# Altium PCB PCB1.PcbDoc
Units mm, origin at the board's own origin, x right, y up, seen from the top; angles counter-clockwise.
Board outline 90 x 65 mm, 4 copper layers (Top Layer, POWER, GND, Bottom Layer), stack 0.603 mm thick; 33 components, 21 nets, 101 pads, 5 vias.
Unrouted connection lines stored in the file: 5.
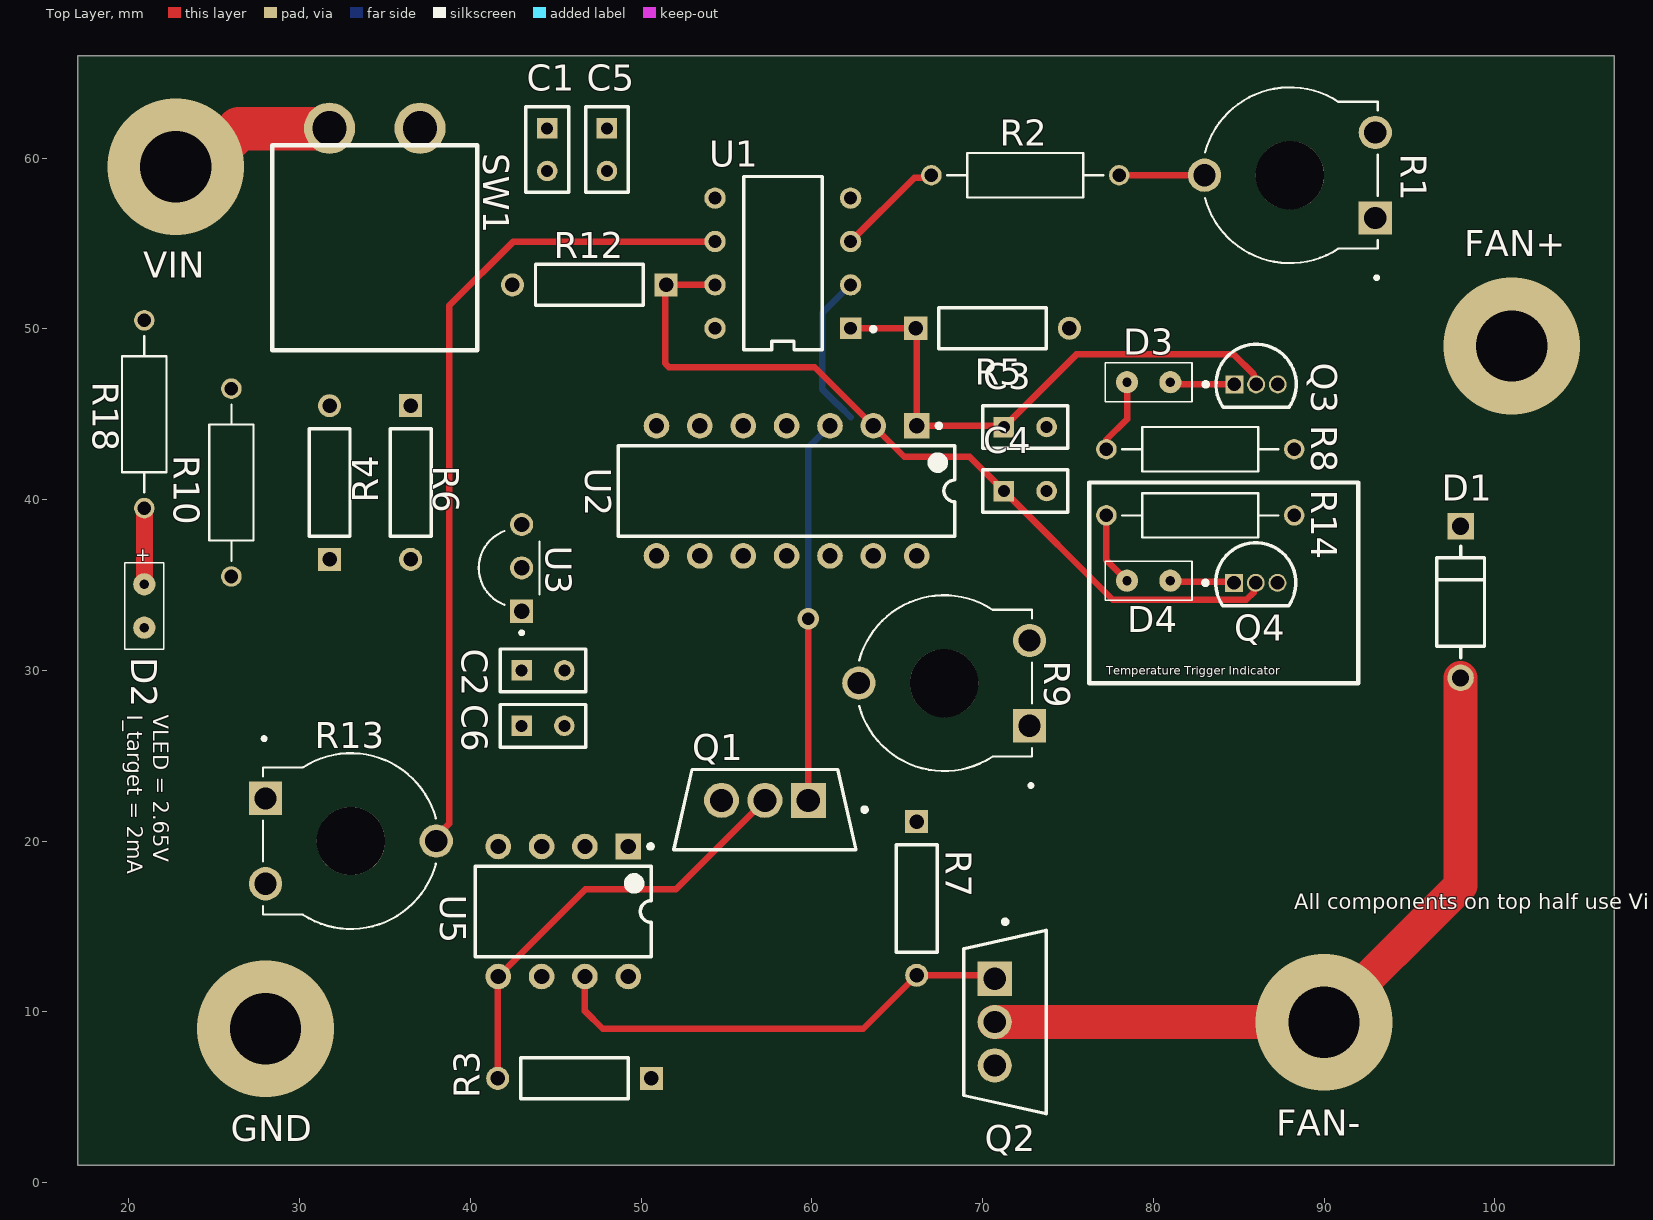
[diagram p0: Top Layer view]
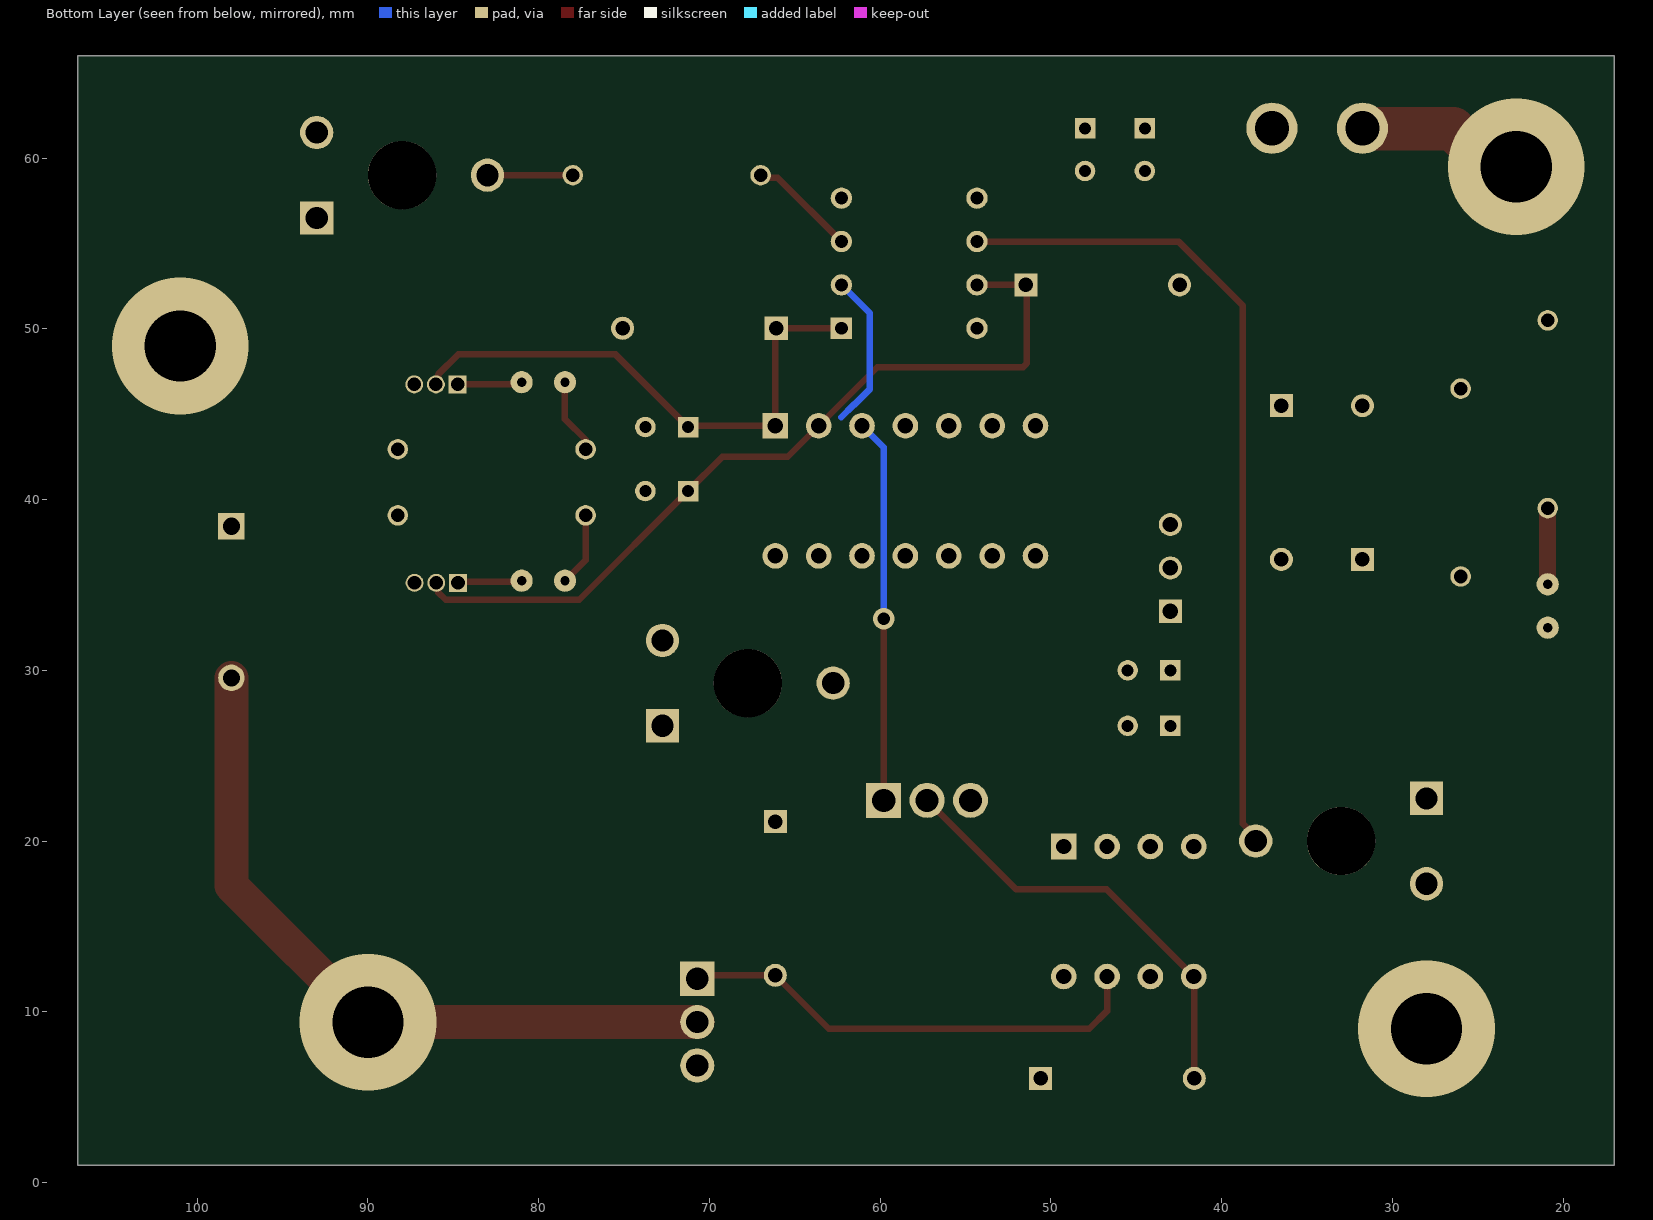
[diagram p1: Bottom Layer view, seen from below]
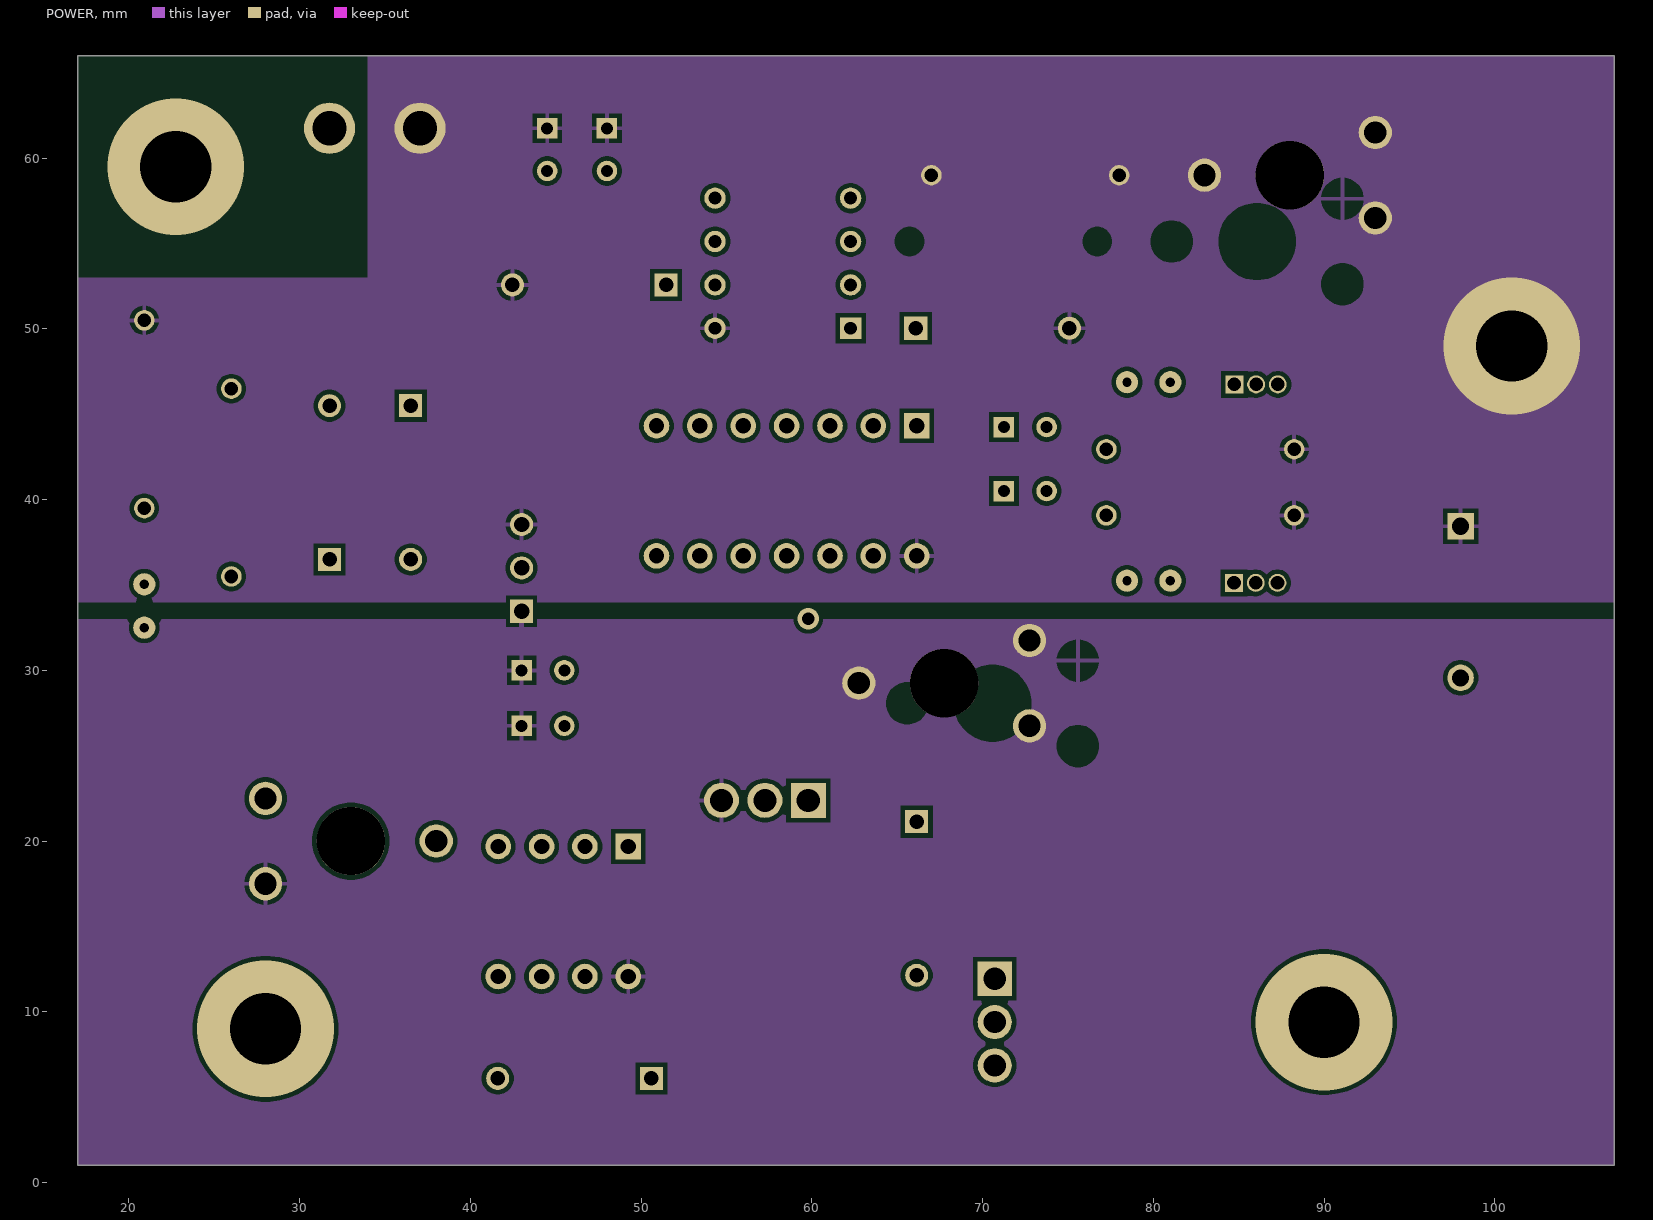
[diagram p2: POWER]
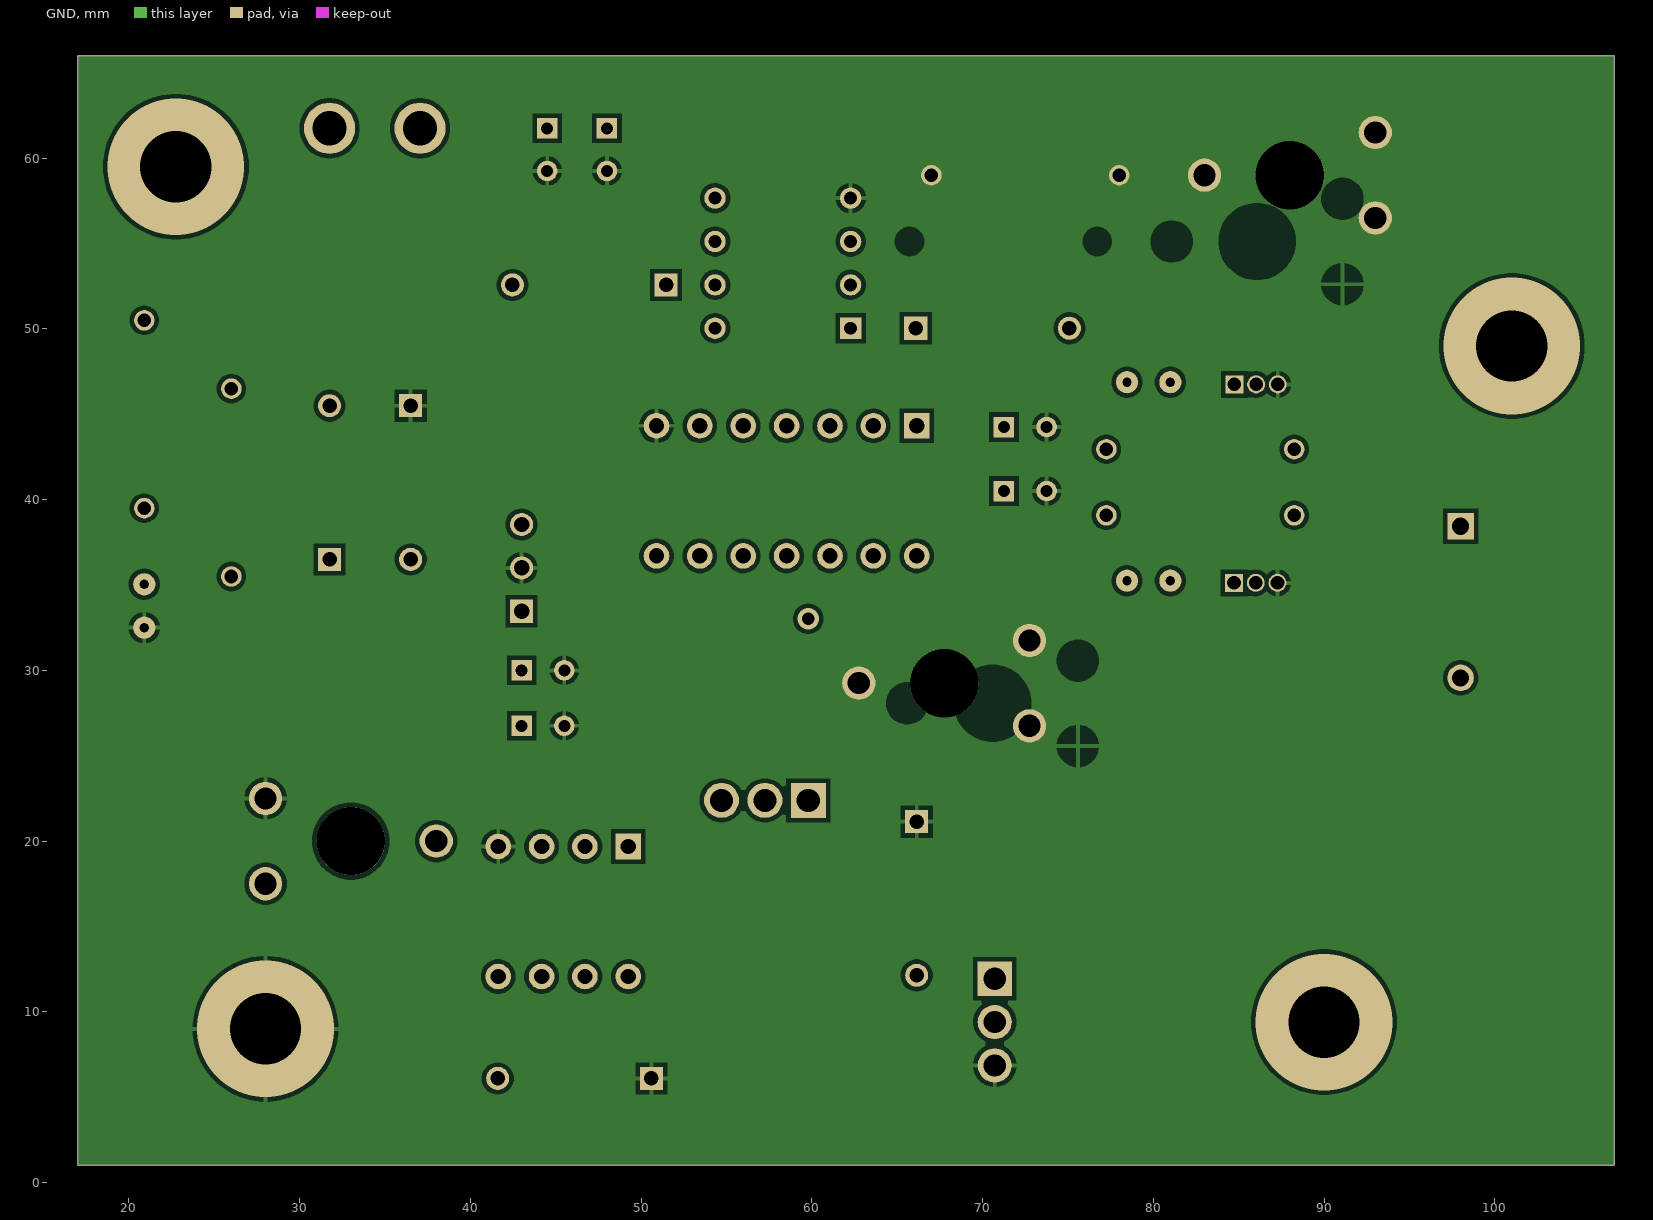
[diagram p3: GND]

## Layer stack, top to bottom
Top Solder: solder mask 0.0102, Solder Resist, Dk 3.5
Top Layer: signal copper 0.0356
Dielectric 2: prepreg 0.0711, PP-006, Dk 4.1
POWER: signal copper 0.035
Dielectric 1: dielectric 0.32, FR-4, Dk 4.8
GND: signal copper 0.035
Dielectric 3: prepreg 0.0711, PP-006, Dk 4.1
Bottom Layer: signal copper 0.0356
Bottom Solder: solder mask 0.0102, Solder Resist, Dk 3.5

## Board outline
17,1 17,66 107,66 107,1

## Design rules (kind name [scope] priority, off if disabled: settings)
Clearance [All] p1: gap=0.254 ignorepadtopadclearanceinfootprint=TRUE except(0.1: Arc-Arc Arc-Track Arc-SMDPad Track-Track Track-SMDPad; 0.2: Arc-Via Track-Via; 0.28: Arc-THPad Track-THPad)
HoleSize [All] p1: absolutevalues=TRUE maxlimit=6.3 minlimit=0.15 maxpercent=80.000 minpercent=20.000
PolygonConnect [All] p1: connectstyle=Relief reliefconductorwidth=0.254 reliefentries=4 polygonreliefangle="90 Angle" airgapwidth=0.254
RoutingVias [All] p1: holewidth=0.711 width=1.27 viastyle="Through Hole" minholewidth=0.711 minwidth=1.27 maxholewidth=0.711 maxwidth=1.27
SolderMaskExpansion [All] p1: expansion=0.102 istentingtop=FALSE
Width [All] p1: maxlimit=2.54 minlimit=0.254 preferedwidth=1 minimp=50.000000 maximp=50.000000 favimp=50.000000
29 further rules are at their usual default settings.

## Components (designator, comment, footprint, x,y, rotation, side; value= is the part's Value field where it differs from the comment)
C1 "RDEC71E105K0P1H03B" FP-RDE0P1-MFG 44.5,60.5 r270 top
C2 "RDEC71E105K0P1H03B" FP-RDE0P1-MFG 44.25,30 r0 top
C3 "RDEC71E105K0P1H03B" FP-RDE0P1-MFG 72.5,44.25 r0 top
C4 "RDEC71E105K0P1H03B" FP-RDE0P1-MFG 72.5,40.5 r0 top
C5 "RDEC71E105K0P1H03B" FP-RDE0P1-MFG 48,60.5 r270 top
C6 "RDEC71E105K0P1H03B" FP-RDE0P1-MFG 44.25,26.75 r0 top
D1 "1N4007" FP-1N4007-MFG 98,34 r270 top value=15pF
D2 "WP7113LZGCK" WP7113LZGCK 20.9,35.04 r270 top
D3 "WP7113LZGCK" WP7113LZGCK 78.46,46.875 r0 top
D4 "WP7113LZGCK" WP7113LZGCK 78.46,35.25 r0 top
Q1 "G050P03T" FP-340AT-MFG 57.25,21.844 r270 top
Q2 "IRLZ44PBF" FP-PG-TO220-3-MFG 71.322,9.398 r0 top
Q3 "BS170" ONSC-TO-92-3-29-11 86.02,46.75 r0 top
Q4 "BS170" ONSC-TO-92-3-29-11 86,35.125 r0 top
R1 "PTN10-D100HB20" TRIM_PTN10-D100HB20 88,59 r90 top
R2 "MFR-25FRF52-10K" RESAD1100W55L680D260 72.5,59 r180 top
R3 "MFR-25FBF52-100K" RESA60-630X240 46.1,6.1 r180 top
R4 "MFR-25FBF52-100K" RESA60-630X240 31.75,41 r90 top
R5 "MFR-25FBF52-100K" RESA60-630X240 70.585,50.038 r0 top
R6 "104AP-2" RESA60-630X240 36.5,41 r270 top
R7 "MFR-25FBF52-100K" RESA60-630X240 66.14,16.637 r270 top
R8 "MFR-25FBF52-12K7" RESAD1100W55L680D260 82.75,42.95 r180 top
R9 "PTN10-D100HB20" TRIM_PTN10-D100HB20 67.75,29.25 r90 top
R10 "MFR-25FRF52-10K" RESAD1100W55L680D260 26,41 r90 top
R12 "MFR-25FBF52-100K" RESA60-630X240 46.963,52.578 r180 top
R13 "PTN10-D100HB20" TRIM_PTN10-D100HB20 33,20 r270 top
R14 "MFR-25FBF52-12K7" RESAD1100W55L680D260 82.75,39.075 r180 top
R18 "RNF14FTD7K50" RESAD1100W55L680D260 20.9,45 r270 top
SW1 "GPTS203211B" GPTS203211B 37.05,61.75 r180 top
U1 "LM393AP" FP-P0008A-MFG 58.299,53.848 r180 top
U2 "CD4001UBE" N0014A 58.52,40.513 r270 top
U3 "AP7381-50V-A" TO92254P480H870-3 43,36 r90 top
U5 "ATtiny13A-PU" 8P3 45.439,15.875 r270 top

## Footprints (in the part's own frame and the unit in brackets; to place one, negate y for a bottom-side part, rotate by r counter-clockwise, add the part's x,y. Pads: shape width x height; smd on the part's side, far side on the other; paste and mask are expansions set on the pad)
8P3 [mm] "DIP, 8-Pin, Row Spacing 7.62 mm, Pitch 2.54 mm"
  rect 1.5x1.5 hole 0.9: 1(-3.81,3.81)
  round 1.5 hole 0.9: 2(-3.81,1.27) 3(-3.81,-1.27) 4(-3.81,-3.81) 5(3.81,-3.81) 6(3.81,-1.27) 7(3.81,1.27) 8(3.81,3.81)
  silkscreen extent -3.93,-5.15 2.65,5.24, body extent -3.6,-5.15 3.6,5.15, height 5.33
FP-1N4007-MFG [mm]
  rect 1.55x1.55 hole 1 paste-2539.97 mask+0: 1(-4.44,0)
  round 1.55 hole 1 paste-2539.97 mask+0: 2(4.44,0)
  silkscreen extent -3.26,-1.4 3.26,1.4, body extent -5.32,-1.5 5.32,1.5, height 0.25
FP-340AT-MFG [mm]
  rect 2.05x2.05 hole 1.35 paste-2539.97 mask+0: 1(-0.54,2.54)
  round 2.05 hole 1.35 paste-2539.97 mask+0: 2(-0.54,0) 3(-0.54,-2.54)
  silkscreen extent -2.35,-5.34 2.35,5.96, body extent -2.45,-5.44 2.45,5.44, height 0.25
FP-P0008A-MFG [mm]
  rect 1.25x1.25 hole 0.75 paste-2539.97 mask+0: 1(-3.97,3.81)
  round 1.25 hole 0.75 paste-2539.97 mask+0: 2(-3.97,1.27) 3(-3.97,-1.27) 4(-3.97,-3.81) 5(3.97,-3.81) 6(3.97,-1.27) 7(3.97,1.27) 8(3.97,3.81)
  silkscreen extent -5.42,-5.08 2.3,5.08, body extent -4.69,-5.18 4.69,5.18, height 0.25
FP-PG-TO220-3-MFG [mm]
  rect 2x2 hole 1.3 paste-2539.97 mask+0: 1(-0.61,2.54)
  round 2 hole 1.3 paste-2539.97 mask+0: 2(-0.61,0) 3(-0.61,-2.54)
  silkscreen extent -2.41,-5.38 2.41,6, body extent -2.51,-5.6 2.51,5.6, height 0.25
FP-RDE0P1-MFG [mm]
  rect 1.2x1.2 hole 0.7 paste-1000 mask+0: 1(-1.25,0)
  round 1.2 hole 0.7 paste-1000 mask+0: 2(1.25,0)
  silkscreen extent -2.5,-1.25 2.5,1.25, body extent -2.6,-1.35 2.6,1.35, height 0.25
GPTS203211B [mm] "Pushbutton Switch SPST Standard Through Hole"
  round 3 hole 2: 1(0,0) 2(5.3,0)
  silkscreen extent -3.35,1 8.65,13
N0014A [mm] "DIP, 14-Leads, Body 19.7x6.6mm, Pitch 2.54mm"
  rect 1.5x1.5 hole 0.9: 1(-3.81,7.62)
  round 1.5 hole 0.9: 2(-3.81,5.08) 3(-3.81,2.54) 4(-3.81,0) 5(-3.81,-2.54) 6(-3.81,-5.08) 7(-3.81,-7.62) 8(3.81,-7.62) 9(3.81,-5.08) 10(3.81,-2.54) 11(3.81,0) 12(3.81,2.54) 13(3.81,5.08) 14(3.81,7.62)
  silkscreen extent -3.93,-9.85 2.65,9.85, body extent -3.95,-9.85 3.95,9.85, height 5.08
ONSC-TO-92-3-29-11 [mm] "TO, 3-Leads, Body Dia 4.7mm, Pitch 1.27mm"
  rect 1.05x1.05 hole 0.8: 1(-1.27,0)
  round 1.05 hole 0.8: 2(0,0) 3(1.27,0)
  silkscreen extent -3.07,-1.34 2.35,2.35, body extent -2.35,-1.33 2.36,2.36, height 7.87
RESA60-630X240 [mm] "Axial Resistor, 2-Leads, Dia 2.4mm, Body Length 6.3mm"
  rect 1.35x1.35 hole 0.85: 1(-4.5,0)
  round 1.35 hole 0.85: 2(4.5,0)
  silkscreen extent -3.15,-1.2 3.15,1.2, body extent -3.15,-1.2 3.15,1.2, height 2.4
RESAD1100W55L680D260 [mm]
  round 1.2 hole 0.8: 1(-5.5,0) 2(5.5,0)
  silkscreen extent -4.58,-1.3 4.58,1.3
TO92254P480H870-3 [mm]
  rect 1.35x1.35 hole 0.9: 1(-2.54,0)
  round 1.35 hole 0.9: 2(0,0) 3(2.54,0)
  silkscreen extent -3.9,-1.04 2.16,2.51
TRIM_PTN10-D100HB20 [mm]
  rect 1.95x1.95 / inner round 1.95 / far side rect 1.95x1.95 hole 1.3: A(-2.5,-5)
  round 1.95 hole 1.3: E(2.5,-5) S(0,5)
  round 4 hole 4 unplated: ""(0,0)
  silkscreen extent -6.1,-5.18 5.15,4.97
WP7113LZGCK [mm]
  round 1.3 hole 0.55: 1(0,0) 2(2.54,0)
  silkscreen extent -1.27,-1.14 3.81,1.14

## Part data
C1 C2 C3 C4 C5 C6: library part CMP-06035-016937-1, "Ceramic Capacitor 1uF ±10% 25V X7S Radial", Capacitance=1uF, Case/Package=Radial, Dielectric=X7S, Max Operating Temperature=125°C, Min Operating Temperature=-55°C, Package Quantity=500, Resistor Type=Ceramic, Tolerance=10%, Voltage Rating=25V, Height=3.5mm, Height - Seated (Max)=0.236inch, Lead Diameter=0.5mm, Lead Pitch=0.098inch, Lead/Base Style=Kinked, Length=3.6mm, Mount="Through Hole", Packaging=Bulk, Termination=Radial, Voltage Rating (DC)=25V, Width=0.098inch
D1: library part CMP-123542-000001-1, "Rectifier diode 1000 V 1 A DO-41, ,", Capacitance=15pF, Forward Current=1A, Manufacturer=Diotec, Max Junction Temp=+175°C, Max Repetitive Reverse Voltage=1000V, Max Surge Forward Current=27A, Peak Reverse Current=5uA, Temperature="-50°C to +175°C", Temperature Range Low=-50°C, Automotive=No, Category=Diode, ComponentLink2Description=Datasheet, ComponentLink2URL=https://datasheet.octopart.com/1N4007-Diotec-datasheet-62346875.pdf, Device Class L1="Discrete Semiconductors", Device Class L2=Diodes, Device Class L3="Rectifier Diodes", Height=2.8mm, Ipc Land Pattern Name=DIOAD888W100L520D280, Lead Free=Yes, Manufacturer Part Number=1N4007, Octopart=https://octopart.com/1n4007-diotec-4040411, Package=1N4007, Reverse Voltage=1000V, RoHS=TRUE, Temperature Range High=+175°C
D2 D3 D4: "Green 525nm LED Indication - Discrete 2.65V Radial"
Q1: library part CMP-00278-84330911-1, "P-30V,-85A,RD(MAX)<5M@-10V,VTH-1", Case/Package=TO-220AB, Continuous Drain Current (ID)=24A, Current Rating=-24A, Drain to Source Breakdown Voltage=-20V, Drain to Source Resistance=5mΩ, Drain to Source Voltage (Vdss)=20V, Gate to Source Voltage (Vgs)=8V, Input Capacitance=1.59nF, Manufacturer Lifecycle Status=OBSOLETE, Max Operating Temperature=175°C, Max Power Dissipation=60W, Min Operating Temperature=-55°C, Resistance=50mΩ, Threshold Voltage=-700mV, Element Configuration=Single, Fall Time=70ns, Height=16.3mm, Lead Free="Lead Free", Length=10.67mm, Lifecycle Status=Obsolete, Mount="Through Hole", NexarPartId=84330911, Number of Elements=1, Number of Pins=3, Power Dissipation=60W, Radiation Hardening=No, Rds On Max=50mΩ, REACH SVHC="No SVHC", Rise Time=27ns, RoHS=Compliant, Schedule B=8541290080, Turn-Off Delay Time=120ns, Turn-On Delay Time=15ns, Voltage Rating (DC)=-20V, Weight=1.8g, Width=4.7mm
Q2: library part CMP-32901-000590-1, "MOSFET N-CH 60V 50A TO220AB", Case/Package=TO-220, Continuous Drain Current (ID)=95A, Drain to Source Voltage (Vdss)=60V, Input Capacitance=4.01nF, Max Operating Temperature=175°C, Max Power Dissipation=125W, Min Operating Temperature=-55°C, Threshold Voltage=3.7V, Halogen Free="Halogen Free", Lead Free="Lead Free", Max Dual Supply Voltage=60V, Mount="Through Hole", Number of Pins=3, Packaging=Rail/Tube, Rds On Max=5.9mR, REACH SVHC="No SVHC"
Q3 Q4: library part CMP-1058-00929-1, "Small Signal MOSFET, 500 mA, 60 V, N-Channel, 3-Pin TO-92, Bulk Box", Manufacturer="On Semiconductor", Package Type=TO-92, Channel Polarity="N Channel", ComponentLink1Description="Manufacturer URL", ComponentLink1URL=http://www.onsemi.com/, ComponentLink2Description=Datasheet, ComponentLink2URL=http://www.onsemi.com/pub_link/Collateral/BS170-D.PDF, ComponentLink3Description="Package Specification", ComponentLink3URL=http://www.onsemi.cn/pub_link/Collateral/2N6426-D.PDF, Configuration=Single, DatasheetVersion="Rev. 6", ID Max (A)=0.5, Mounting Technology="Through Hole", PackageDescription="3-Pin Transistor Outline, Body 4.825 x 3.685 mm, Pitch 1.27 mm", PackageReference=TO-92-3-29-11_AM_SL, PackageVersion="Rev. AM", Packing="Bulk Box", PartNumber=BS170, PD Max (W)=0.35, V(BR)DSS Min (V)=60, VGS Max (V)=20, VGS(th) Max (V)=3
R1 R9 R13: "10 mm, 1 MÎ©, Linear, Through Hole, Vertical, Shaftless Hexagonal Trimmer Potentiometer", Package=None, Check_prices=https://www.snapeda.com/parts/PTN10-D100HB20/CUI+Devices/view-part/?ref=eda, CUI_purchase_URL=https://www.cuidevices.com/product/motion-and-control/potentiometers/trimmer-potentiometers/ptn10-d100hb20?utm_source=snapeda.com&utm_medium=referral&utm_campaign=snapedaBOM, MF="CUI Devices", MP=PTN10-D100HB20, SnapEDA_Link=https://www.snapeda.com/parts/PTN10-D100HB20/CUI+Devices/view-part/?ref=snap
R2 R10: "RES 280K OHM 1/4W 1% AXIAL", Package=None, Availability=Unavailable, MP=MFR-25FRF52-10K, Price=None
R3 R4 R5 R7 R12: library part CMP-1659-00073-1, "Axial Resistor, 100 KOhm, +/- 1%, 0.25 W, -55 to 155 degC, 2-Pin THD, RoHS, Bulk", Case\Package=Axial, Max Operating Temperature="155 degC", Min Operating Temperature="-55 degC", Package Quantity=200, Power Rating="250 mW", Resistance="475 Ohm", Tolerance=1%, Voltage Rating="250 V", ComponentLink1Description="Manufacturer URL", ComponentLink1URL=http://www.yageo.com/, ComponentLink2Description=Datasheet, ComponentLink2URL=http://www.yageo.com/documents/recent/Yageo%20LR_MFR_2013.pdf, DatasheetVersion=Apr-13, Length="0.248 inch", Mount="Through Hole", PackageDescription="2-Pin Axial Lead, Dia 2.4 mm, Body Length 6.3 mm", PackageReference=MFR-25, Packaging=Bulk, RoHSCompliant=true
R6: library part CMP-1659-00073-1, "NTC THERMISTORS 100KOHM 0.5%", Case\Package=Axial, Max Operating Temperature="155 degC", Min Operating Temperature="-55 degC", Package Quantity=200, Power Rating="250 mW", Resistance="475 Ohm", Tolerance=1%, Voltage Rating="250 V", ComponentLink1Description="Manufacturer URL", ComponentLink1URL=http://www.yageo.com/, ComponentLink2Description=Datasheet, ComponentLink2URL=http://www.yageo.com/documents/recent/Yageo%20LR_MFR_2013.pdf, DatasheetVersion=Apr-13, Length="0.248 inch", Mount="Through Hole", PackageDescription="2-Pin Axial Lead, Dia 2.4 mm, Body Length 6.3 mm", PackageReference=MFR-25, Packaging=Bulk, RoHSCompliant=true
R8 R14: "RES 12.7K OHM 1% 1/4W AXIAL"
R18: library part MFR-25FRF52-10K, "RES 280K OHM 1/4W 1% AXIAL", Package=None, Availability=Unavailable, MP=MFR-25FRF52-10K, Price=None
SW1: "Pushbutton Switch SPST Standard Through Hole"
U1: library part CMP-04896-000062-1, "IC DUAL DIFF COMPARATOR 8-DIP", Case/Package=PDIP, Input Bias Current=250nA, Input Offset Voltage (Vos)=2mV, Max Dual Supply Voltage=18V, Max Operating Temperature=70°C, Max Supply Current=500uA, Max Supply Voltage=30V, Min Dual Supply Voltage=1V, Min Operating Temperature=0°C, Min Supply Voltage=2V, Nominal Supply Current=1mA, Output Current=20mA, Output Current Per Channel=6mA, Package Quantity=50, Quiescent Current=2.5mA, Voltage Gain=106.02dB, Contact Plating=Gold, Lead Free="Lead Free", Max Input Current=250nA, Mount="Through Hole", Number Of Channels=2, Number of Elements=2, Number of Pins=8, Output Type=TTL, Packaging=Rail/Tube, Radiation Hardening=No, REACH SVHC="No SVHC", Response Time=0.3us, RoHS Compliant=Yes, Type="General Purpose", Weight=0.015535oz
U2: library part CMP-0806-00187-3, "CMOS Quad 2-Input NOR Gate, N0014A, TUBE", F @ Nom Voltage(Max)(Mhz)=8, Generic Part Number=CD4001UB, ICC @ Nom Voltage(Max)(mA)=0.015, Manufacturer="Texas Instruments", Operating Temperature Range(C)="-55 to 125", Rating=Catalog, tpd @ Nom Voltage(Max)(ns)=60, Voltage(Nom)(V)=10, Bits(#)=4, Code_JEDEC=MS-001, DatasheetVersion=SCHS016C, Input Type=CMOS, Output Drive (IOL/IOH)(Max)(mA)=1.5/-1.5, Output Type=CMOS, PackageReference=N0014A, PackageVersion=http://www.ti.com/lit/ml/mpdi002c/mpdi002c.pdf, VCC(Max)(V)=18, VCC(Min)(V)=3
U3: "Linear Voltage Regulator IC Positive Fixed 1 Output 150mA TO-92", Package="TO-92 Diodes Inc.", Check_prices=https://www.snapeda.com/parts/AP7381-50V-A/Diodes%20Inc./view-part/2887105/?ref=eda, Digi-Key_Part_Number=AP7381-50V-ADICT-ND, MF="Diodes Inc.", MP=AP7381-50V-A, Purchase-URL=https://pricing.snapeda.com/search/part/AP7381-50V-A/?ref=eda, SnapEDA_Link=https://www.snapeda.com/parts/AP7381-50V-A/Diodes%20Inc./view-part/2887105/?ref=snap
U5: library part CMP-0093-00049-2, "8-bit AVR Microcontroller, 1.8-5.5V, 20MHz, 1KB Flash, 64 Bytes EEPROM, 64 Bytes SRAM, 8-pin PDIP, Industrial Grade (-40°C to 85°C), Pb-Free", Code_JEDEC=MS-001-BA, ComponentLink1Description="Manufacturer URL", ComponentLink1URL=http://www.atmel.com/, ComponentLink2Description="ATtiny13A Datasheet", ComponentLink2URL=http://www.atmel.com/dyn/resources/prod_documents/doc8126.pdf, ComponentLink3Description="ATtiny13A Summary", ComponentLink3URL=http://www.atmel.com/dyn/resources/prod_documents/8126S.pdf, DatasheetVersion="revE, Jul-2010", PackageDescription="8-Lead, 0.300\" Wide Body, Plastic Dual In-Line Package (PDIP)", PackageReference=8P3, PackageVersion="revB, Jan-2002", RevisionNote="DatasheetVersion updated. URLs added."

## Via types
v1: diameter 8/8/8/8 (per signal layer), hole 4.18, Top Layer to Bottom Layer, 4 vias
v2: diameter 1.27, hole 0.711, Top Layer to Bottom Layer, 1 vias

## Nets (pads, with @x,y where several pads share a name; then routed paths per layer and width w, separated by ;. In a path a pad name is that pad's centre, name@x,y a point inside that pad or via, vN(x,y) a via of type N, cw(c..) or ccw(c..) an arc to the next point about the centre after c; other vN are vias at no path point)
GND: C1.2 C2.2 C3.2 C4.2 C5.2 C6.2 D2.2 Q2.3 Q3.3 Q4.3 R1.A R3.1 R6.1 R7.1 R9.A R13.A U1.4 U2.7 U3.2 U5.4
  other v1: 28,9
NetC3_1: C3.1 Q3.2 R5.1 U1.1 U2.1 | length 32.2
  Top Layer w0.381: U1.1 R5.1 66.14,49.983 U2.1 71.177,44.323 C3.1 75.5,48.5 84.715,48.5 85.892,47.323 85.892,46.878 Q3.2
NetC4_1: C4.1 Q4.2 R12.1 U1.7 U2.2 | length 48.5
  Top Layer w0.381: U1.7 R12.1 51.408,52.523 51.408,47.975 51.631,47.752 60.171,47.752 U2.2 65.414,42.509 69.241,42.509 C4.1 77.62,34.13 85.45,34.13 85.872,34.552 85.872,34.997 Q4.2
NetD1_2: D1.2 Q2.2 | length 42.6
  Top Layer w2: Q2.2 89.398,9.398 v1@89.699,9.699 ; v1(90,9.398) 98,17.398 D1.2
NetD2_1: D2.1 R18.2 | length 4.5
  Top Layer w1: D2.1 R18.2
NetD3_1: D3.1 R8.2 | length 3.8
  Top Layer w0.381: R8.2@77.25,43.5 78.46,44.71 D3.1@78.46,46.75
NetD3_2: D3.2 Q3.1 | length 3.8
  Top Layer w0.381: D3.2@81,46.75 Q3.1
NetD4_1: D4.1 R14.2 | length 4.3
  Top Layer w0.381: R14.2 77.25,36.46 D4.1
NetD4_2: D4.2 Q4.1 | length 3.8
  Top Layer w0.381: D4.2 81.062,35.188 84.668,35.188 Q4.1
NetQ1_1: Q1.1 U2.3 | length 22.5
  Top Layer w0.381: Q1.1 v2(59.79,33.02)
  Bottom Layer w0.381: v2(59.79,33.02) 59.79,43.053 U2.3
NetQ1_2: Q1.2 R3.2 U5.5 | length 26.3
  Top Layer w0.381: R3.2 41.614,6.115 41.614,12.05 U5.5 46.729,17.165 52.031,17.165 Q1.2 Q1.2@57.556,22.078
NetQ2_1: Q2.1 R7.2 U5.7 | length 27.8
  Top Layer w0.381: U5.7 46.709,10.041 47.75,9 63.003,9 R7.2 70.513,12.137 Q2.1
NetR1_S: R1.S R2.1 | length 5
  Top Layer w0.381: R2.1 R1.S
  Bottom Layer w0.381: R2.1@77.99,58.99 R2.1
NetR2_2: R2.2 U1.3 | length 6.3
  Top Layer w0.381: U1.3 65.994,58.843 66.843,58.843 R2.2
NetR4_1: R4.1 R6.2 R10.1
NetR9_S: R9.S U1.2 | length 9.2
  Bottom Layer w0.381: U1.2 60.6,50.909 60.6,46.472 61.529,45.544 61.566,45.544 62.281,44.829
NetR10_2: R10.2 U1.5
NetR13_S: R13.S U1.6 | length 48.8
  Top Layer w0.381: R13.S 38,20.258 38.75,21.008 38.75,51.35 42.518,55.118 U1.6
NetSW1_2: SW1.2 | length 9.9
  Top Layer w2.54: v1(22.75,59.5) 24.227,59.5 26.44,61.713 31.713,61.713 SW1.2
VCC: C1.1 C5.1 D1.1 R1.E R5.2 R8.1 R12.2 R14.1 R18.1 SW1.1 U1.8 U2.14 U3.3 | length 0.6
  Top Layer w0.381: R12.2@42.463,52.316 R12.2 ; U2.14 U2.14@66.443,36.703
  other v1: 101,49
VDD: C2.1 C6.1 Q1.3 R4.2 R9.E R13.E U3.1 U5.8 | length 0.1
  Top Layer w0.381: U5.8@49.267,12.083 U5.8 U5.8@49.275,12.039
pads on no net: R1. R9. R13. U2.4 U2.5 U2.6 U2.8 U2.9 U2.10 U2.11 U2.12 U2.13 U5.1 U5.2 U5.3 U5.6
copper on no net: | length 0
  Bottom Layer w0.381: 46.705,19.689 46.709,19.685

## Polygon pours and split planes (outlines as drawn)
VDD on POWER "VDD_L02_P001" (solid, pour order 1): 17,1 17,33 107,33 107,1
VCC on POWER "VCC_L02_P003" (solid, pour order 3): 17,34 17,53 34,53 34,66 107,66 107,34
GND on GND "GND_L03_P000" (solid, pour order 0): 17,66 17,1 107,1 107,66

## Silkscreen, mask and mechanical layers (free items; w line width, h text height)
Top Overlay:
  lines w0.254: 76.25,29.25 92,29.25 92,41 76.25,41 76.25,29.25
  text "FAN+" at 98.207,54.254 h1.52
  text "VIN" at 20.846,53.004 h1.52
  text "+" at 20.5,37.17 h0.8 r270
  text "Temperature Trigger Indicator" at 77.25,29.75 h0.5
  text "VLED = 2.65V / I_target = 2mA" at 19.6,27.4 h1.52 r270
  text "All components on top half use Vin, all components on bottom half use regulated 5V" at 88.25,16 h0.9
  text "FAN-" at 87.207,2.754 h1.52
  text "GND" at 25.969,2.404 h1.52